# EAGLE board Mainboard_PCB (EAGLE 9.7.0)
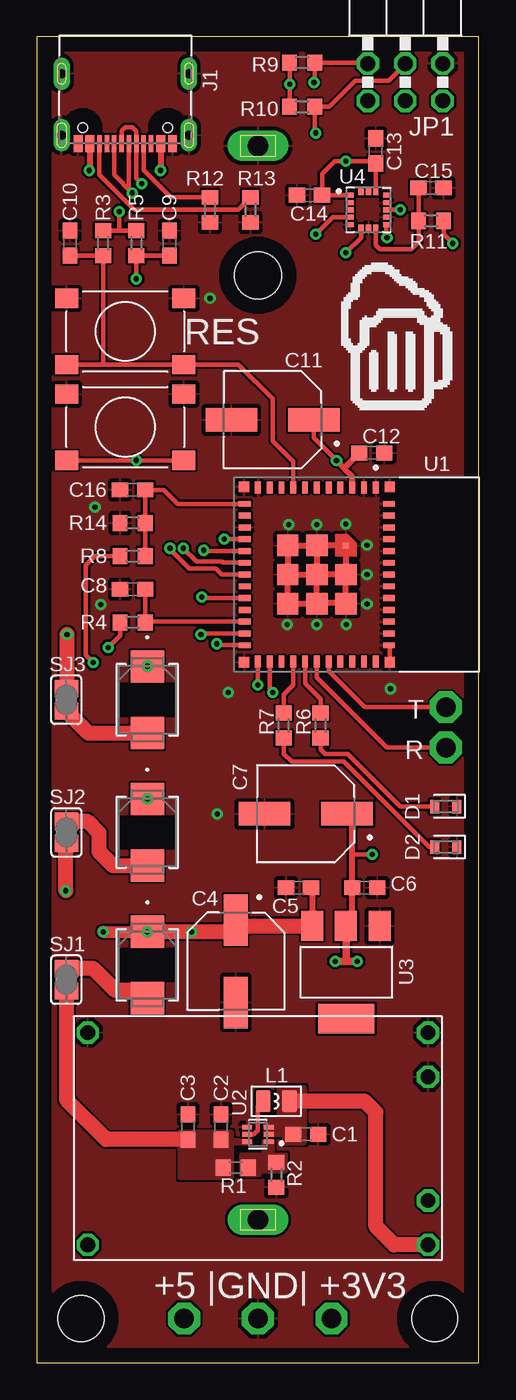
[diagram p0: board, top side]
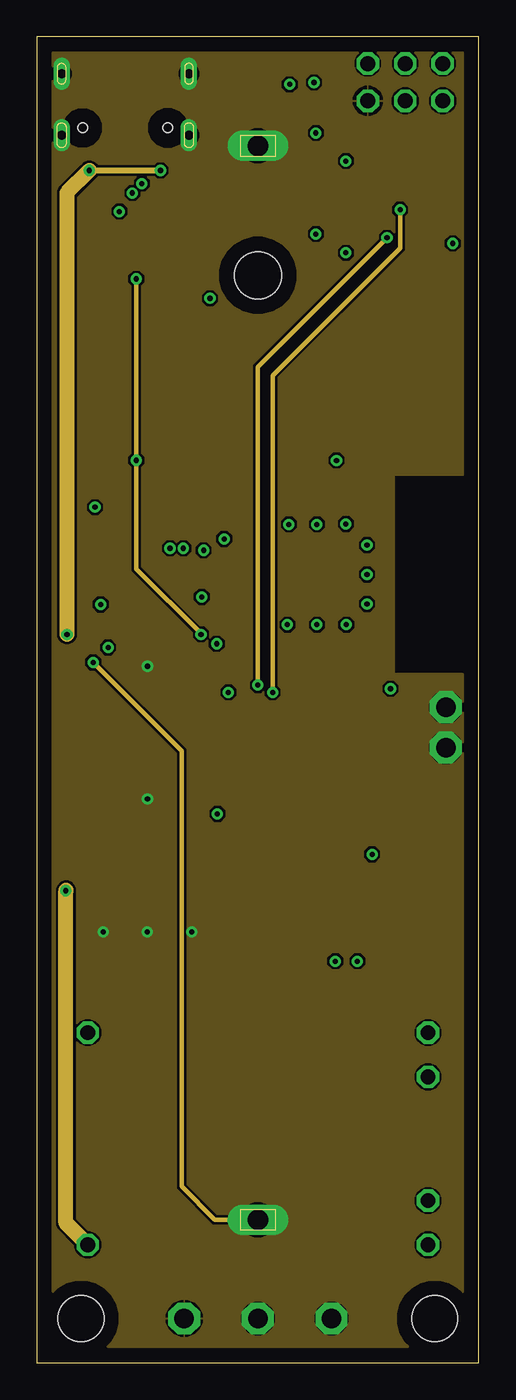
[diagram p1: board, inner layer Route2]
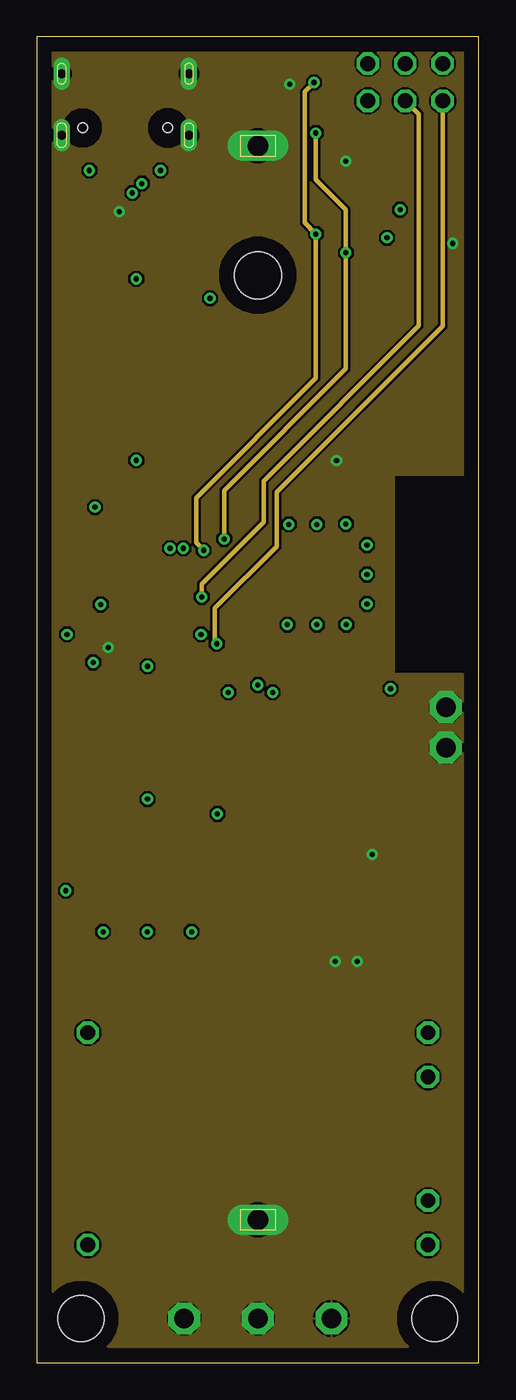
[diagram p2: board, inner layer Route15]
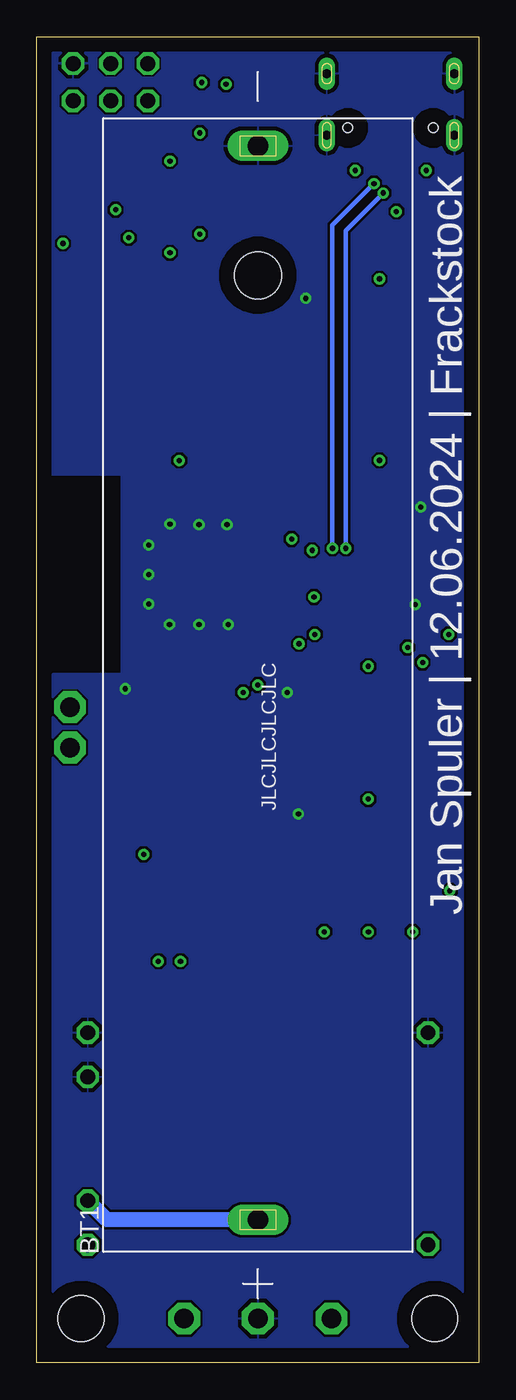
[diagram p3: board, bottom side, seen from below]

Size 30 x 90 mm. Coordinates in mm from the lower left corner, seen from the top.
Outline: 0,0 30,0 30,90 0,90 0,0
Copper layers (1+2*15+16): Top / Route2 / Route15 / Bottom
Stack-up 4 Layer Stack: Top SilkScreen Epoxy Ink / Top SolderMask User Defined 0.0254mm Dk 4.3 / Top Surface Finish Lead-Free 0.02mm / Top CuFoil:007 0.035mm / Dielectric-1 Prepreg:001 0.064mm / Dielectric-2 Prepreg:001 0.064mm / Route2 CuFoil:007 0.035mm / Dielectric-3 Core:066 0.711mm / Route15 CuFoil:007 0.035mm / Dielectric-4 Prepreg:001 0.064mm / Dielectric-5 Prepreg:001 0.064mm / Bottom CuFoil:007 0.035mm / Bottom Surface Finish Lead-Free 0.02mm / Bottom SolderMask User Defined 0.0254mm Dk 4.3 / Bottom SilkScreen Epoxy Ink
Design rules: minimum copper width 6mil, minimum drill size 0.35mm, copper clearance wire_polygon to wire_polygon 6mil, copper clearance wire_polygon to pad_smd 6mil, copper clearance wire_polygon to via 6mil, copper clearance pad_smd to pad_smd 6mil, copper clearance pad_smd to via 6mil, copper clearance via to via 6mil, copper clearance smd to pad (same net) 6mil, copper clearance smd to via (same net) 6mil, copper clearance smd to smd (same net) 6mil, dimension clearance 40mil, via restrict clearance 0mil, restrict clearance 0mil, drill distance 6mil, keepout clearance 0mil
Holes 3.1 mm at 3,3 27,3

## Footprints (pad centres in the part's own frame; a part is rotated, then mirrored left to right if it is on the bottom)
BAT_BK-18650-PC2 = drill 1.38 long: + -36.3,0; - 36.6,0 | hole 3.2: 27.81,0
C0603 = smd 1.1 x 1: 1 -0.85,0; 2 0.85,0
CAP_50SVPF10M = smd 3.5 x 1.6: 1 -2.8,0; 2 2.8,0
DO-214BA_MCH-M = smd 2.184 x 2.261: 1 -2.261,0; 2 2.261,0
LEDC1608X55N_FLAT-R = smd 0.612 x 0.912: A 0.75,0; C -0.75,0
AMPHENOL_12402012E212A = smd 0.6 x 1.14: A1_B12 -3.2,4.75; A4_B9 -2.4,4.75; B1_A12 3.2,4.75; B4_A9 2.4,4.75 | smd 0.3 x 1.14: A5 -1.25,4.75; A6 -0.25,4.75; A7 0.25,4.75; A8 1.25,4.75; B5 1.75,4.75; B6 0.75,4.75; B7 -0.75,4.75; B8 -1.75,4.75 | drill 0.6 pad 1.05 long: SH1 -4.32,4.18; SH2 4.32,4.18 | drill 0.6 pad 0.9 long: SH3 -4.32,0; SH4 4.32,0 | hole 0.65: 2.89,3.68; -2.89,3.68
2X03/90 = drill 1.016 octagon: 1 -2.54,-6.35; 2 -2.54,-3.81; 3 0,-6.35; 4 0,-3.81; 5 2.54,-6.35; 6 2.54,-3.81
INDUCTOR_L0806 = smd 1.016 x 1.524: 1 -0.889,0; 2 0.889,0
TESTPAD_HOLE = drill 1.321 pad 2.159 octagon: TP 0,0
R0603 = smd 1 x 1.1: 1 -0.85,0; 2 0.85,0
PTS645-SMT-6MM = smd 1.55 x 1.3: P$1 -3.975,2.25; P$2 3.975,2.25; P$3 -3.975,-2.25; P$4 3.975,-2.25
SJ = smd 1.168 x 1.6: 1 -0.762,0; 2 0.762,0
XCVR_ESP32-C6-MINI-1-N4 = smd 0.8 x 0.4: 1 -5.9,4; 2 -5.9,3.2; 3 -5.9,2.4; 4 -5.9,1.6; 5 -5.9,0.8; 6 -5.9,0; 7 -5.9,-0.8; 8 -5.9,-1.6; 9 -5.9,-2.4; 10 -5.9,-3.2; 11 -5.9,-4; 25 5.9,-4; 26 5.9,-3.2; 27 5.9,-2.4; 28 5.9,-1.6; 29 5.9,-0.8; 30 5.9,0; 31 5.9,0.8; 32 5.9,1.6; 33 5.9,2.4; 34 5.9,3.2; 35 5.9,4 | smd 0.4 x 0.8: 12 -4.8,-4.9; 13 -4,-4.9; 14 -3.2,-4.9; 15 -2.4,-4.9; 16 -1.6,-4.9; 17 -0.8,-4.9; 18 0,-4.9; 19 0.8,-4.9; 20 1.6,-4.9; 21 2.4,-4.9; 22 3.2,-4.9; 23 4,-4.9; 24 4.8,-4.9; 36 4.8,4.9; 37 4,4.9; 38 3.2,4.9; 39 2.4,4.9; 40 1.6,4.9; 41 0.8,4.9; 42 0,4.9; 43 -0.8,4.9; 44 -1.6,4.9; 45 -2.4,4.9; 46 -3.2,4.9; 47 -4,4.9; 48 -4.8,4.9 | smd 0.4 x 0.4: 49_1 -1.975,1.975 | smd 1.45 x 1.45: 49_2 0,1.975; 49_3 1.975,1.975; 49_4 -1.975,0; 49_5 0,0; 49_6 1.975,0; 49_7 -1.975,-1.975; 49_8 0,-1.975; 49_9 1.975,-1.975 | smd 0.7 x 0.7: 50 5.95,4.95; 51 5.95,-4.95; 52 -5.95,-4.95; 53 -5.95,4.95
SOT50P160X60-6N = smd 0.66 x 0.31: 1 -0.735,0.5; 2 -0.735,0; 3 -0.735,-0.5; 4 0.735,-0.5; 5 0.735,0; 6 0.735,0.5
SOT223 = smd 1.499 x 2.007: 1 -2.261,-3.15; 2 0.025,-3.15; 3 2.311,-3.15 | smd 3.81 x 2.007: 4 0,3.15
XDCR_LIS3DHTR = smd 0.45 x 0.35: 1 -1.225,1; 2 -1.225,0.5; 3 -1.225,0; 4 -1.225,-0.5; 5 -1.225,-1; 9 1.225,-1; 10 1.225,-0.5; 11 1.225,0; 12 1.225,0.5; 13 1.225,1 | smd 0.35 x 0.45: 6 -0.5,-1.225; 7 0,-1.225; 8 0.5,-1.225; 14 0.5,1.225; 15 0,1.225; 16 -0.5,1.225
HOLE_1MM = drill 1 octagon: P$1 0,0

## Placement (x,y rotation side)
BT1  BK-18650-PC2  [BAT_BK-18650-PC2]  15,46 90 bottom
C1  10uF  [C0603]  18.25,15.5 0 top
C2  22uF  [C0603]  12.5,16 90 top
C3  22uF  [C0603]  10.25,16 90 top
C4  10uF  [CAP_50SVPF10M]  13.5,27.25 270 top
C5  10uF  [C0603]  17.75,32.25 180 top
C6  22uF  [C0603]  22.25,32.25 0 top
C7  22uF  [CAP_50SVPF10M]  18.25,37.25 180 top
C8  100n  [C0603]  6.5,52.5 180 top
C9  100n  [C0603]  9,76 90 top
C10  100n  [C0603]  2.25,76 90 top
C11  10uF  [CAP_50SVPF10M]  16,64 180 top
C12  100n  [C0603]  22.72,61.74 0 top
C13  100n  [C0603]  23,82.25 90 top
C14  10uF  [C0603]  18.5,79.25 180 top
C15  100n  [C0603]  26.75,79.75 0 top
C16  100n  [C0603]  6.5,59.25 180 top
CR1  LSM115JE3/TR13DO-214BA_MCH-M  [DO-214BA_MCH-M]  7.5,27 270 top
CR2  LSM115JE3/TR13DO-214BA_MCH-M  [DO-214BA_MCH-M]  7.5,36 270 top
CR3  LSM115JE3/TR13DO-214BA_MCH-M  [DO-214BA_MCH-M]  7.5,45 270 top
D1  LED_RED  [LEDC1608X55N_FLAT-R]  27.75,37.75 180 top
D2  LED_RED  [LEDC1608X55N_FLAT-R]  27.75,35 180 top
J1  12402012E212A  [AMPHENOL_12402012E212A]  6,87.5 180 top
JP1  PINHD-2X3/90  [2X03/90]  25,92 0 top
L1  1uh  [INDUCTOR_L0806]  16.25,17.75 180 top
R  TESTPAD  [TESTPAD_HOLE]  27.75,41.75 0 top
R1  732k  [R0603]  13.5,13.25 0 top
R2  100k  [R0603]  16.25,12.75 90 top
R3  10k  [R0603]  4.5,76 90 top
R4  10k  [R0603]  6.5,50.25 180 top
R5  10k  [R0603]  6.75,76 90 top
R6  1k  [R0603]  19.25,43.25 90 top
R7  1k  [R0603]  16.75,43.25 90 top
R8  10k  [R0603]  6.5,54.75 180 top
R9  10k  [R0603]  18,88.25 180 top
R10  10k  [R0603]  18,85.25 180 top
R11  10k  [R0603]  26.75,77.5 0 top
R12  5k1  [R0603]  11.75,78.25 270 top
R13  5k1  [R0603]  14.5,78.25 270 top
R14  10k  [R0603]  6.5,57 0 top
S1  PTS645SM43SMTR92LFS  [PTS645-SMT-6MM]  6,70 0 top
S2  PTS645SM43SMTR92LFS  [PTS645-SMT-6MM]  6,63.5 0 top
SJ1  [SJ]  2,26 90 top
SJ2  [SJ]  2,36 270 top
SJ3  [SJ]  2,45 90 top
T  TESTPAD  [TESTPAD_HOLE]  27.75,44.5 0 top
U1  ESP32-C6-MINI-1-N4  [XCVR_ESP32-C6-MINI-1-N4]  19,53.5 270 top
U2  TPS61023DRLT  [SOT50P160X60-6N]  15,15.5 180 top
U3  LD1117  [SOT223]  21,26.5 180 top
U4  LIS3DHTR  [XDCR_LIS3DHTR]  22.5,78.25 0 top
U$1  PIN_1X1X2.56  [HOLE_1MM]  3.45,8 0 top
U$2  PIN_1X1X2.56  [HOLE_1MM]  3.45,22.4 0 top
U$3  PIN_1X1X2.56  [HOLE_1MM]  26.55,8 0 top
U$4  PIN_1X1X2.56  [HOLE_1MM]  26.55,22.4 0 top
U$5  PIN_1X1X2.56  [HOLE_1MM]  26.55,11 0 top
U$6  PIN_1X1X2.56  [HOLE_1MM]  26.55,19.4 0 top
U$7  TESTPAD  [TESTPAD_HOLE]  10,3 0 top
U$8  TESTPAD  [TESTPAD_HOLE]  20,3 0 top
U$9  TESTPAD  [TESTPAD_HOLE]  15,3 0 top

## Library data of the parts
BT1 = BK-18650-PC2; MANUFACTURER: MPD; MAXIMUM_PACKAGE_HEIGHT: 21.41 mm; PARTREV: F; STANDARD: Manufacturer Recommendations
C1-C3 C5 C6 C8-C10 C12-C16 = rcl; SPICEPREFIX: C
C4 C7 C11 = 50SVPF10M; MANUFACTURER: Panasonic; MAXIMUM_PACKAGE_HEIGHT: 5.9mm; PARTREV: 28-Jun-19; STANDARD: Manufacturer Recommendations
CR1-CR3 = 2024-05-29_14-46-41_Library; COPYRIGHT: Copyright (C) 2024 Ultra Librarian. All rights reserved.; MANUFACTURER_PART_NUMBER: LSM115JE3/TR13; MFR_NAME: Microchip
D1 D2 = LED; CATEGORY: LED; COLOR: RED; DESCRIPTION: CHIP LED FLAT; SUB-CATEGORY: CHIP; TYPE: FLAT_TOP
J1 = 12402012E212A; MANUFACTURER: Amphenol; MAXIMUM_PACKAGE_HEIGHT: 3.26 mm; PARTREV: 4; STANDARD: Manufacturer Recommendations
JP1 = Connector; CATEGORY: Headers; DESCRIPTION: Header, Right Angle, 2x3 Position; MANUFACTURER: Generic; MPN: Generic; OPERATING_TEMPERATURE: Generic; PART_STATUS: Active; PITCH: 0.100" (2.54mm); ROHS_COMPLIANCE: Generic; SERIES: Generic; SUB-CATEGORY: Headers, Male Pins; TYPE: Board to Board or Cable, Unshrouded, Through Hole, Right Angle
L1 = BeagleBone_Blue_R3
R S1 S2 T U$1-U$9 = hbli8971
R1-R14 = rcl; SPICEPREFIX: R
SJ1-SJ3 = jumper
U1 = ESP32-C6-MINI-1-N4; MANUFACTURER: Espressif Systems; MAXIMUM_PACKAGE_HEIGHT: 2.55 mm; PARTREV: 1.0; STANDARD: Manufacturer recommendations
U2 = TPS61023DRLT
U3 = PulseOximeterECG_AU; MF: TEXAS INSTRUMENTS; MPN: REG1117FAKTTT; OC_FARNELL: 1296120; OC_NEWARK: 87H2562
U4 = LIS3DHTR; MANUFACTURER: STMicroelectronics; MAXIMUM_PACKAGE_HEIGHT: 1mm; PARTREV: 2; STANDARD: Manufacturer Recommendations

## Nets
+3V3: C6.1 C7.1 C11.1 C12.1 C13.1 C14.1 R3.2 R4.2 R5.2 R9.2 R10.2 R11.2 U1.3 U3.2 U4.1 U4.14 U$8.TP
B+: BT1.+ R8.2 U$5.P$1
BAT_CHRG: SJ2.2 U$1.P$1
CC1A: J1.A5 R12.1
CC1B: J1.B5 R13.1
EN: C10.1 R3.1 S1.P$3 S1.P$4 U1.8
GND: BT1.- C1.2 C2.2 C3.2 C4.2 C5.2 C6.2 C7.2 C8.2 C9.2 C10.2 C11.2 C12.2 C13.2 C14.2 C15.2 C16.2 D1.C D2.C J1.A1_B12 J1.B1_A12 J1.SH1 J1.SH2 J1.SH3 J1.SH4 JP1.6 R2.1 R12.2 R13.2 R14.1 S1.P$1 S1.P$2 S2.P$1 S2.P$2 U1.1 U1.2 U1.11 U1.14 U1.36 U1.37 U1.38 U1.39 U1.40 U1.41 U1.42 U1.43 U1.44 U1.45 U1.46 U1.47 U1.48 U1.49_1 U1.49_2 U1.49_3 U1.49_4 U1.49_5 U1.49_6 U1.49_7 U1.49_8 U1.49_9 U1.50 U1.51 U1.52 U1.53 U2.4 U3.1 U4.5 U4.7 U4.10 U4.12 U$2.P$1 U$4.P$1 U$6.P$1 U$9.TP
GPIO8: C8.1 R4.1 U1.22
GPIO9: C9.1 R5.1 S2.P$3 S2.P$4 U1.23
GPIO15: JP1.3 U1.20
GPIO18: JP1.5 U1.24
GPIO21: U1.27
GPIO22: R7.2 U1.28
GPIO23: R6.2 U1.29
LIS_INT_1: U1.26 U4.11
LIS_INT_2: U1.25 U4.9
LP_I2C_SCL: JP1.2 R9.1 U1.16 U4.4
LP_I2C_SDA: JP1.4 R10.1 U1.15 U4.6
N$1: C2.1 C3.1 CR1.2 R1.1 SJ1.1 SJ1.2 U2.6
N$2: CR2.2 SJ2.1
N$3: L1.2 U2.5
N$5: R1.2 R2.2 U2.1
N$7: U1.19
N$9: D1.A R6.1
N$10: D2.A R7.1
N$11: U1.10
N$12: U1.9
N$16: C15.1 R11.1 U4.8
N$30: CR3.2 J1.A4_B9 J1.B4_A9 SJ3.1 SJ3.2
OUT+: C1.1 L1.1 U2.2 U2.3 U$3.P$1
U0RXD: R.TP U1.30
U0TXD: T.TP U1.31
USB_N: J1.A7 J1.B7 U1.17
USB_P: J1.A6 J1.B6 U1.18
V_BAT_MEAS: C16.1 R8.1 R14.2 U1.12
VCC: C4.1 C5.1 CR1.1 CR2.1 CR3.1 JP1.1 U3.3 U$7.TP

## Tracks (layer width: path | path; a pad name or v marks a point on that pad's centre or on a via)
+3V3  (via drill 0.35)
  Top 0.305: U4.1 C14.1 19.35,80.71 20.21,81.56 v20.97,81.56 22.84,81.56 C13.1 U4.14 | R9.2 v17.16,86.77 v17.15,86.76 R10.2 | v28.22,75.98 27.6,76.6 R11.2 | R3.2 5.5,76.85 | 5.5,76.85 R5.2 | v5.6,78.14 5.6,76.95 5.5,76.85 | R4.2 5.65,49.35 v4.84,48.55 | v22.75,34.5 21.4,34.5 | C11.1 18.8,62.78 v20.33,61.24
  Top 0.406: U3.2 21.4,29.65 C6.1 21.4,34.5 21.4,37.25 C7.1 | U1.3 21.4,60.18 20.91,60.67 | 20.91,60.67 v20.33,61.24 | 20.91,60.67 20.91,60.78 C12.1
  Top 0.508: v20.25,27.25 21,27.25 | 21,27.25 v21.75,27.25 | U3.2 21,29.62 21,27.25
  pour Route15 (rank 2): -2,92 32,92 32,60.2 24.3,60.2 24.3,46.8 32.1,46.8 32,-2 -2,-2
B+  (via drill 0.35)
  Top 0.305: R8.2 3.93,54.75 3.32,54.13 3.32,48.04 v3.82,47.53
  Route2 0.305: BT1.+ 12.08,9.7 9.82,11.96 9.82,41.54 v3.82,47.53
  Bottom 1.016: BT1.+ 25.25,9.7 U$5.P$1
BAT_CHRG  (via drill 0.35)
  Top 1.016: v1.97,32.03 1.97,35.21 SJ2.2
  Route2 1.016: U$1.P$1 1.97,9.48 v1.97,32.03 1.99,32.06
CC1A
  Top 0.305: J1.A5 7.25,80.93 9.08,79.1 R12.1
CC1B
  Top 0.305: J1.B5 4.25,80.63 6.62,78.26 13.66,78.26 R13.1
EN
  Top 0.305: C10.1 R3.1 4.5,67.84 4.59,67.75 | S1.P$3 4.59,67.75 | 4.59,67.75 S1.P$4 13.68,67.75 15.99,65.44 15.99,62.57 17.4,61.17 U1.8
GND  (via drill 0.35)
  Top 0.305: U1.36 23.95,48.65 U1.50
  Top 0.406: U1.49_8 U1.49_7 U1.49_4 | U1.49_8 U1.49_9 U1.49_6 | U1.49_6 U1.49_5 | U1.49_4 19,53.62 | 19,53.62 U1.49_5 | U1.49_2 19.12,53.5 19,53.62 | U1.49_4 U1.49_1 U1.49_2 | U1.49_8 U1.49_5 | U1.49_3 20.98,51.59 | 20.98,51.59 U1.49_2 | U1.49_6 19.07,51.59 20.98,51.59
  other vias: 4.33,51.47 3.95,58.07 20.97,56.93 19,56.9 22.4,53.5 22.4,51.5 21,50.1 19,50.1 17,50.1 17.1,56.9 22.4,55.5 13,45.5 12.25,37.25 11.75,72.25 24,45.75
  pour Top (rank 2): -1,91 31,91 31,60.2 24.3,60.2 24.3,46.8 31.1,46.8 31,-1 -1,-1
  pour Bottom (rank 2): -1.5,91.5 31.5,91.5 31.5,60.2 24.3,60.2 24.3,46.8 31.6,46.8 31.5,-1.5 -1.5,-1.5
GPIO8
  Top 0.305: R4.1 7.35,50.32 | 7.35,50.32 C8.1 | U1.22 7.37,50.3 7.35,50.32
GPIO9  (via drill 0.35)
  Top 0.305: C9.1 R5.1 v6.75,73.57 v6.74,73.56 | S2.P$3 v6.74,61.25 S2.P$4 | U1.23 11.26,49.5 11.19,49.43 v11.14,49.43
  Route2 0.305: v6.74,73.56 v6.74,61.25 6.74,53.88 11.14,49.48 v11.14,49.43
GPIO15  (via drill 0.35)
  Top 0.305: U1.20 11.26,51.9 v11.19,51.97
  Route15 0.305: v11.19,51.97 11.19,52.86 15.38,57.05 15.38,59.85 25.92,70.39 25.92,84.76 25.03,85.65 JP1.3
GPIO18  (via drill 0.35)
  Top 0.305: U1.24 12.3,48.7 v12.21,48.8
  Route15 0.305: v12.21,48.8 12.08,48.93 12.08,51.21 16.27,55.4 16.27,59.09 27.54,70.36 JP1.5
GPIO22
  Top 0.305: U1.28 17.4,45.99 16.75,45.34 R7.2
GPIO23
  Top 0.305: U1.29 18.2,46.11 19.25,45.06 R6.2
LIS_INT_1  (via drill 0.35)
  Top 0.305: U4.11 23.74,78.26 v24.65,78.26 | v16,45.5 15.8,45.7 U1.26
  Route2 0.305: v24.65,78.26 24.65,75.65 16,67 v16,45.5
LIS_INT_2  (via drill 0.35)
  Top 0.305: U4.9 23.73,76.4 v23.76,76.36 | v15,46 U1.25
  Route2 0.305: v23.76,76.36 15,67.59 v15,46
LP_I2C_SCL  (via drill 0.35)
  Top 0.305: U4.4 20.07,77.75 v18.94,76.61 | v18.81,86.9 18.85,86.94 R9.1 22.43,88.25 22.43,88.22 JP1.2 | v11.32,55.15 11.32,55.1 U1.16
  Route15 0.305: v18.81,86.9 18.18,86.26 18.18,77.37 v18.94,76.61 18.94,66.83 10.81,58.7 10.81,55.66 v11.32,55.15
LP_I2C_SDA  (via drill 0.35)
  Top 0.305: U4.6 22,76.37 v20.97,75.34 | v18.94,83.47 18.85,83.56 R10.1 19.83,85.25 21.6,87.03 23.89,87.03 25,88.14 JP1.4 | v12.71,55.91 14.09,55.91 U1.15
  Route15 0.305: v18.94,83.47 18.94,80.3 20.97,78.26 v20.97,75.34 20.97,67.47 12.71,59.21 v12.71,55.91
N$1
  Top 0.508: SJ1.2 SJ1.1
  Top 1.016: C3.1 4.71,15.15 2,17.86 SJ1.1 | CR1.2 6.94,25.3 5.3,25.3 3.83,26.76 SJ1.2
  pour Top (no thermals): 14.64,15.22 13.35,15.22 13.35,15.8 9.56,15.8 9.56,12.41 13.35,12.41 13.35,14.74 14.64,14.74
N$2
  Top 1.016: SJ2.1 3.41,36.76 4.21,35.97 4.21,34.7 5.17,33.74 CR2.2
N$3
  Top 0.305: U2.5 14.72,15.5 15,15.78 15,17.39 L1.2
N$5
  pour Top (no thermals): 15.25,15.17 15.25,14.26 13.73,14.26 13.73,12.6 15.25,12.6 15.25,12.86 17.03,12.86 17.03,14.26 16.14,14.26 16.14,15.17
N$9
  Top 0.305: D1.A 24.65,37.75 21.1,41.31 19.57,41.31 19.25,41.63 R6.1
N$10
  Top 0.305: D2.A 26.64,35 20.84,40.8 17.29,40.8 16.75,41.33 R7.1
N$16
  Top 0.305: C15.1 R11.1 25.9,76.08 25.41,75.6 23.26,75.6 23,75.85 U4.8
N$30  (via drill 0.35)
  Top 0.406: J1.B4_A9 3.6,80.96 v3.57,80.93 | J1.A4_B9 v8.4,80.93
  Top 0.508: SJ3.2 SJ3.1
  Top 1.016: SJ3.1 3.5,42.74 CR3.2 | v2.05,49.43 2.05,45.81 SJ3.2
  Route2 0.406: v8.4,80.93 v3.57,80.93
  Route2 1.016: v2.05,49.43 2.05,79.41 v3.57,80.93
OUT+
  Top 1.016: U$3.P$1 24.25,8 23,9.25 23,17 22.25,17.75 L1.1
  pour Top (no thermals): 15.38,15.32 16.65,15.32 16.65,14.76 18.3,14.76 18.3,18.83 16.27,18.83 16.27,16.67 15.38,16.67
U0RXD
  Top 0.305: U1.30 19,46.5 23.75,41.75 R.TP
U0TXD
  Top 0.305: U1.31 19.8,46.95 22.25,44.5 T.TP
USB_N  (via drill 0.35)
  Top 0.305: v7.13,80.04 6.75,80.42 J1.B7 6.75,83.59 6.49,83.85 5.98,83.85 5.75,83.62 J1.A7 | U1.17 12.61,54.3 12.53,54.38 10.84,54.38 v9.94,55.28
  Bottom 0.305: v7.13,80.04 9.94,77.23 v9.94,55.28
USB_P  (via drill 0.35)
  Top 0.305: J1.A6 6.25,79.63 v6.48,79.4 5.25,80.63 J1.B6 | U1.18 12.55,53.5 12.13,53.92 10.33,53.92 9.03,55.22 v9.03,55.28
  Bottom 0.305: v6.48,79.4 9.03,76.85 v9.03,55.28
V_BAT_MEAS
  Top 0.305: 7.35,54.71 R8.1 R14.2 C16.1 8.61,59.25 9.56,58.3 U1.12
VCC  (via drill 0.35)
  Top 0.305: CR1.1 v7.5,29.25 | CR2.1 v7.51,38.26 | CR3.1 v7.51,47.27
  Top 0.406: C5.1 18.69,32.25 U3.3
  Top 0.813: v4.5,29.25 v7.49,29.25 CR1.1
  Top 1.016: CR1.1 13.5,29.26 C4.1 13.5,29.65 U3.3
  other vias: 10.5,29.25
  pour Route2 (rank 2): -2.5,92.5 32.5,92.5 32.5,60.2 24.3,60.2 24.3,46.8 32.6,46.8 32.5,-2.5 -2.5,-2.5

## Text on the board
SilkscreenBottom: Jan Spuler | 12.06.2024 | Frackstock | JLCJLCJLCJLC
NamesTop: RES | +5 |GND| +3V3